# EAGLE board pcb board (EAGLE 9.2.2)
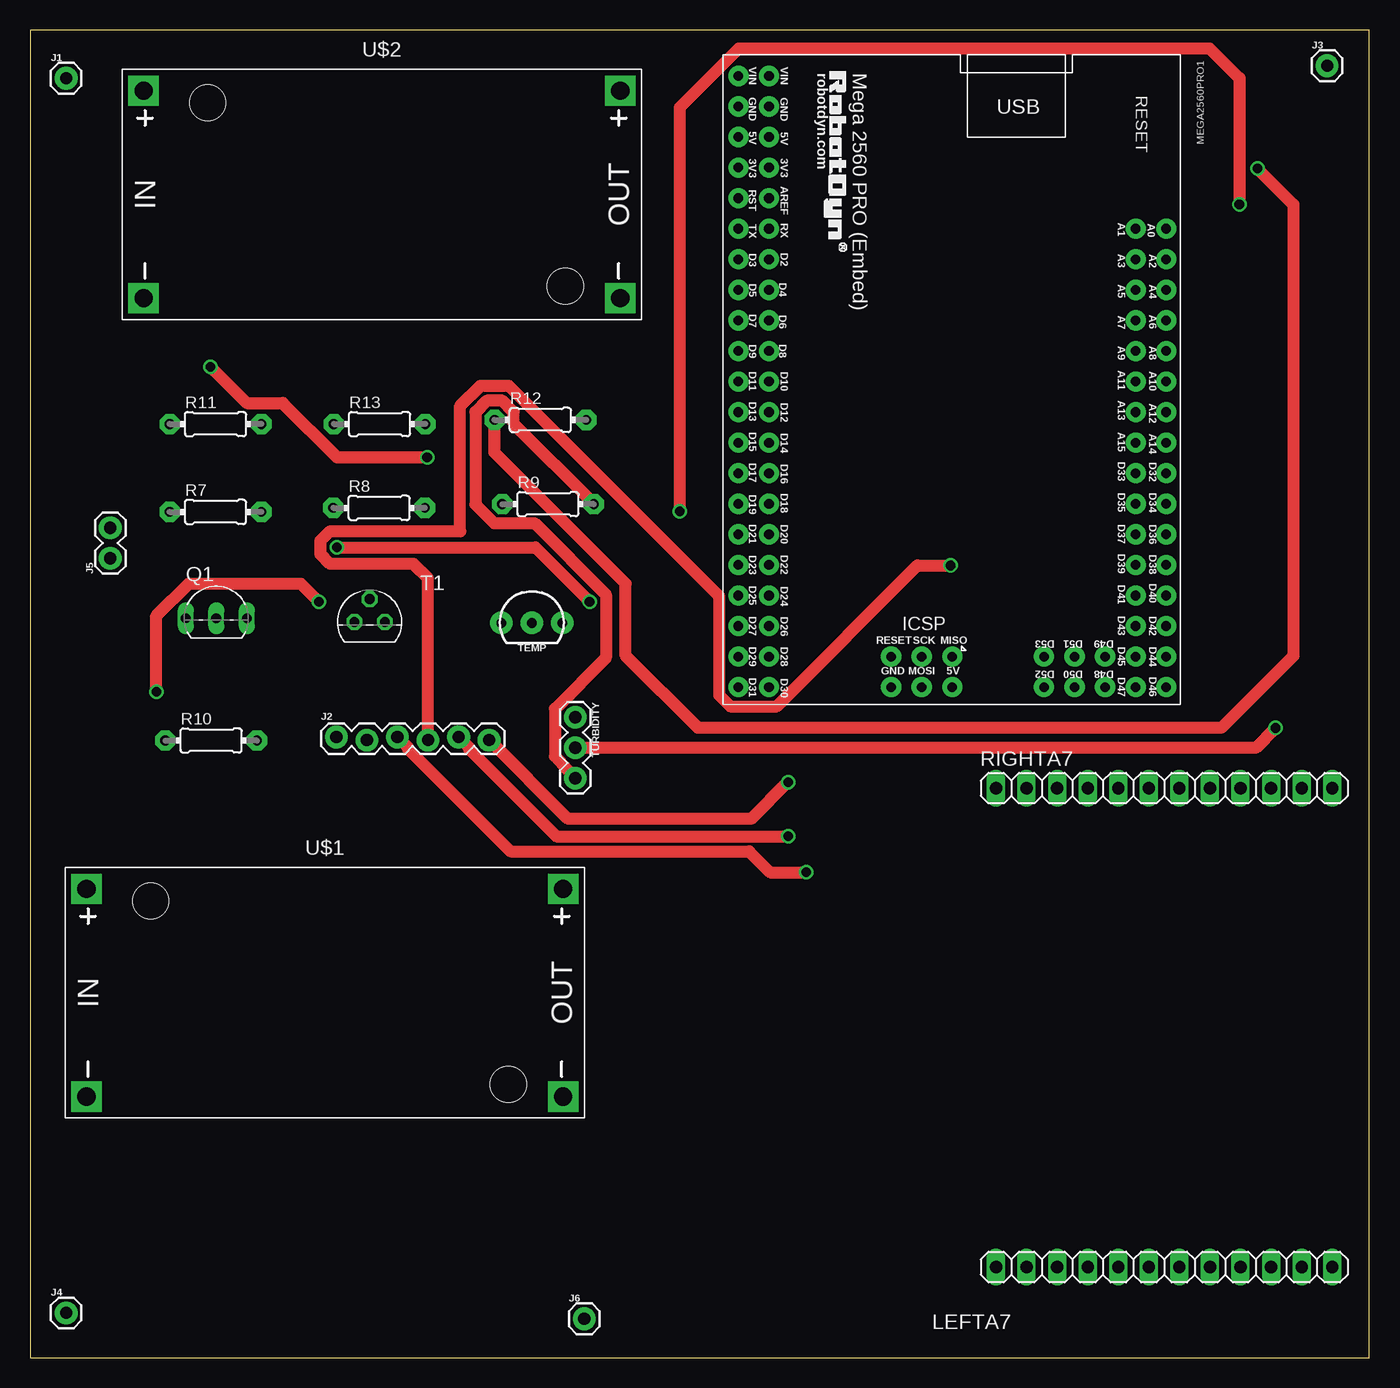
[diagram p0: board, top side]
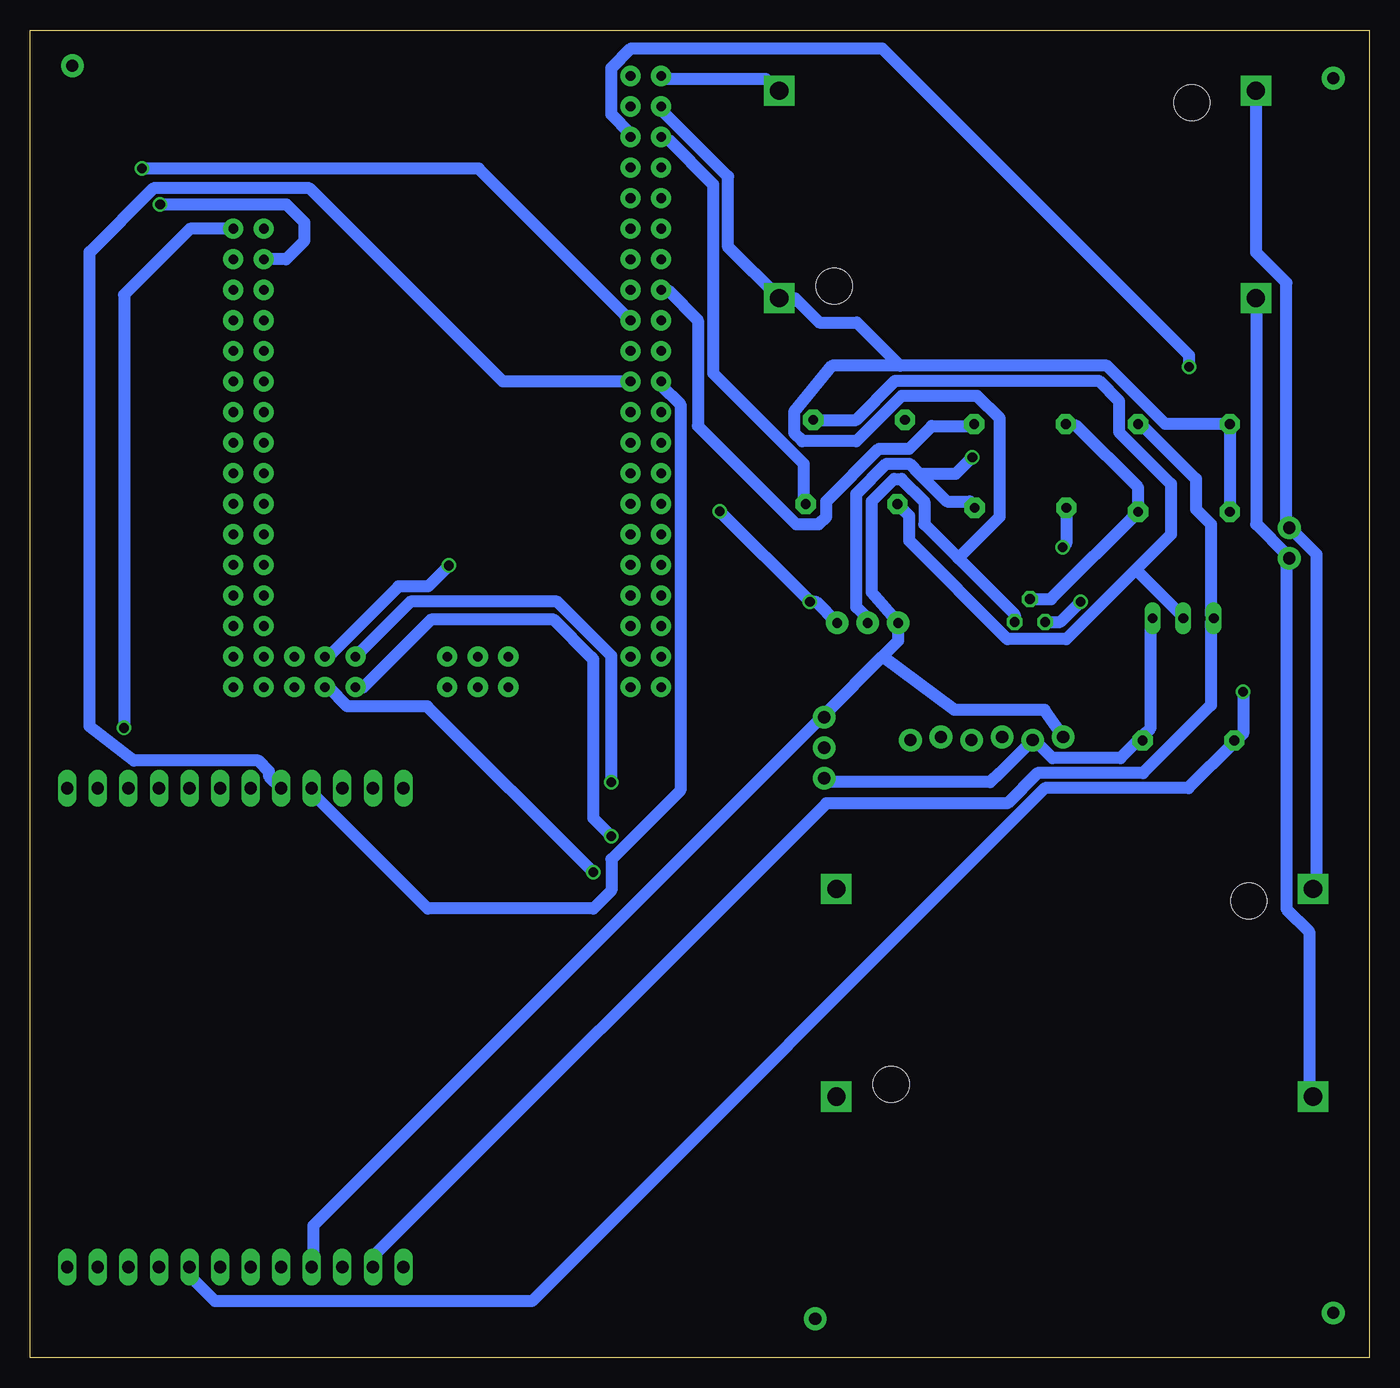
[diagram p1: board, bottom side, seen from below]

Size 111.31 x 110.32 mm. Coordinates in mm from the lower left corner, seen from the top.
Outline: 0,0 111.31,0 111.31,110.32 0,110.32 0,0
Copper layers (1*16): Top 0.035mm / dielectric 1.5mm / Bottom 0.035mm
Design rules "default": minimum track width 6mil, minimum drill 0.35mm, track to track 6mil, track to pad 6mil, pad to pad 6mil, via to via 6mil, smd to smd 6mil, copper to edge 40mil, drill to drill 6mil, minimum pad ring 10mil, minimum via ring 8mil, stop-mask expansion 4mil, vias tented up to drill 0mil, thermal gap 10mil
Net classes: 0 default: width 1 mm, drill 0.8 mm, clearance 0.254 mm

## Footprints (pad centres in the part's own frame; a part is rotated, then mirrored left to right if it is on the bottom)
1X01 = drill 1.016 pad 1.88: 1 0,0
1X06_LOCK = drill 1.016 pad 1.88: 1 0,0; 2 2.54,-0.254; 3 5.08,0; 4 7.62,-0.254; 5 10.16,0; 6 12.7,-0.254
1X02 = drill 1.016 pad 1.88: 1 0,0; 2 2.54,0
1X12 = drill 1.016 long: 1 -13.97,0; 2 -11.43,0; 3 -8.89,0; 4 -6.35,0; 5 -3.81,0; 6 -1.27,0; 7 1.27,0; 8 3.81,0; 9 6.35,0; 10 8.89,0; 11 11.43,0; 12 13.97,0
MEGA2560PRO-EMBED = drill 0.8 pad 1.676: 3V3@1 -25.4,-19.05; 3V3@2 -25.4,-16.51; 5V@1 -27.94,-19.05; 5V@2 -27.94,-16.51; 5V@3 17.78,-1.27; A0 -20.32,16.51; A1 -20.32,13.97; A2 -17.78,16.51; A3 -17.78,13.97; A4 -15.24,16.51; A5 -15.24,13.97; A6 -12.7,16.51; A7 -12.7,13.97; A8 -10.16,16.51; A9 -10.16,13.97; A10 -7.62,16.51; A11 -7.62,13.97; A12 -5.08,16.51; A13 -5.08,13.97; A14 -2.54,16.51; A15 -2.54,13.97; AREF -22.86,-16.51; D2 -17.78,-16.51; D3 -17.78,-19.05; D4 -15.24,-16.51; D5 -15.24,-19.05; D6 -12.7,-16.51; D7 -12.7,-19.05; D8 -10.16,-16.51; D9 -10.16,-19.05; D10 -7.62,-16.51; D11 -7.62,-19.05; D12 -5.08,-16.51; D13 -5.08,-19.05; D14 -2.54,-16.51; D15 -2.54,-19.05; D16 0,-16.51; D17 0,-19.05; D18 2.54,-16.51; D19 2.54,-19.05; D20 5.08,-16.51; D21 5.08,-19.05; D22 7.62,-16.51; D23 7.62,-19.05; D24 10.16,-16.51; D25 10.16,-19.05; D26 12.7,-16.51; D27 12.7,-19.05; D28 15.24,-16.51; D29 15.24,-19.05; D30 17.78,-16.51; D31 17.78,-19.05; D32 0,16.51; D33 0,13.97; D34 2.54,16.51; D35 2.54,13.97; D36 5.08,16.51; D37 5.08,13.97; D38 7.62,16.51; D39 7.62,13.97; D40 10.16,16.51; D41 10.16,13.97; D42 12.7,16.51; D43 12.7,13.97; D44 15.24,16.51; D45 15.24,13.97; D46 17.78,16.51; D47 17.78,13.97; D48 17.78,11.43; D49 15.24,11.43; D50 17.78,8.89; D51 15.24,8.89; D52 17.78,6.35; D53 15.24,6.35; GND@1 -30.48,-19.05; GND@2 -30.48,-16.51; GND@3 17.78,-6.35; MISO 15.24,-1.27; MOSI 17.78,-3.81; RESET 15.24,-6.35; RST -22.86,-19.05; RX -20.32,-16.51; SCK 15.24,-3.81; TX -20.32,-19.05; VIN@1 -33.02,-19.05; VIN@2 -33.02,-16.51
TO92-EBC = drill 0.813 long: B 0,-1.27; C -2.54,-1.27; E 2.54,-1.27
0204/7 = drill 0.813 pad 1.676 octagon: 1 -3.81,0; 2 3.81,0
TO92 = drill 0.813 octagon: 1 1.27,0; 2 0,1.905; 3 -1.27,0
TO-92-AMMO = drill 0.813 pad 1.88: 1 -2.54,0; 2 0,0; 3 2.54,0
1X03 = drill 1.016 pad 1.88: 1 0,0; 2 2.54,0; 3 5.08,0
DC-DC-STEP-DOWN-LM2596 = drill 1.5 pad 2.5 square: IN+ -19.812,8.636; IN- -19.812,-8.636; OUT+ 19.812,8.636; OUT- 19.812,-8.636 | hole 3: -14.478,7.62; 15.24,-7.62

## Placement (x,y rotation side)
J1  [1X01]  3,106.32 0 top
J2  [1X06_LOCK]  25.45,51.57 0 top
J3  [1X01]  107.8,107.36 0 top
J4  [1X01]  3,3.71 0 top
J5  [1X02]  6.66,66.42 90 top
J6  [1X01]  46.05,3.22 0 top
LEFTA7  [1X12]  94.25,7.52 0 top
MEGA2560PRO1  MEGA2560PRO-EMBED  [MEGA2560PRO-EMBED]  77.92,73.5 270 top
Q1  BC557  [TO92-EBC]  15.48,62.71 0 top
R7  1k  [0204/7]  15.41,70.28 0 top
R8  4.7K  [0204/7]  29,70.61 0 top
R9  1k  [0204/7]  43.04,70.93 0 top
R10  1k  [0204/7]  15.04,51.28 0 top
R11  1k  [0204/7]  15.41,77.58 0 top
R12  1k  [0204/7]  42.41,77.93 0 top
R13  1k  [0204/7]  29.04,77.58 0 top
RIGHTA7  [1X12]  94.25,47.32 0 top
T1  BC547  [TO92]  28.22,61.13 0 top
TEMP  DS18B20  [TO-92-AMMO]  41.7,61.05 0 top
TURBIDITY  455-1750-1-ND  [1X03]  45.31,53.22 270 top
U$1  DC-DC-STEP-DOWN-LM2596  [DC-DC-STEP-DOWN-LM2596]  24.5,30.32 0 top
U$2  DC-DC-STEP-DOWN-LM2596  [DC-DC-STEP-DOWN-LM2596]  29.24,96.66 0 top

## Library data of the parts
J1-J6 = SparkFun-Connectors
LEFTA7 R7-R13 RIGHTA7 = adafruit
MEGA2560PRO1 = robotdyn
Q1 = transistor-pnp
T1 = transistor
TEMP = SparkFun-Sensors; STORE_ID: SEN-00245
TURBIDITY = SparkFun-Connectors; PROD_ID: XXX-00000
U$1 U$2 = diy-modules

## Nets
50: J2.3 MEGA2560PRO1.D50
51: J2.4 MEGA2560PRO1.D51
52: J2.5 MEGA2560PRO1.D52
53: J2.6 MEGA2560PRO1.D53
A0: MEGA2560PRO1.A0 TURBIDITY.2
A3: MEGA2560PRO1.A3 R8.1 TEMP.3
CONN: J2.2 MEGA2560PRO1.5V@1 Q1.E R9.2 R10.2 TURBIDITY.3
CONN1: MEGA2560PRO1.5V@2 R8.2 TEMP.2
GND: J2.1 LEFTA7.4 MEGA2560PRO1.GND@1 R7.1 R11.1 T1.1 TEMP.1 TURBIDITY.1 U$2.OUT-
MEGA5: MEGA2560PRO1.D5 R13.2
MEGA6: MEGA2560PRO1.D6 R12.1
N$1: Q1.B R9.1 R12.2
N$27: R7.2 R13.1 T1.2
P1: J5.2 U$1.IN+ U$2.IN+
P2: J5.1 U$1.IN- U$2.IN-
PWR: LEFTA7.2 Q1.C R11.2
RST: LEFTA7.8 R10.1 T1.3
URXD: MEGA2560PRO1.D11 RIGHTA7.4
UTXD: MEGA2560PRO1.D10 RIGHTA7.5
VIN: MEGA2560PRO1.VIN@1 U$2.OUT+

## Tracks (layer width: path | path; a pad name or v marks a point on that pad's centre or on a via)
50  (via drill 0.8)
  Top 1: J2.3 31.38,50.73 31.38,50.62 39.92,42.07 59.75,42.07 61.5,40.32 v64.5,40.32
  Bottom 1: v64.5,40.32 78.3,54.12 84.92,54.12 86.52,55.71 MEGA2560PRO1.D50
51  (via drill 0.8)
  Top 1: v76.5,65.82 73.77,65.82 62.06,54.12 58.2,54.12 57.27,55.05 57.27,63.28 39.78,80.78 37.42,80.78 35.75,79.11 35.75,68.68 24.94,68.68 24.14,67.89 24.14,66.76 24.94,65.97 31.85,65.97 33.07,64.75 J2.4
  Bottom 1: v76.5,65.82 78.25,64.08 80.69,64.08 86.52,58.25 MEGA2560PRO1.D51
52  (via drill 0.8)
  Top 1: J2.5 36.46,50.73 36.46,50.62 43.75,43.32 v63,43.32
  Bottom 1: v63,43.32 64.5,44.82 64.5,58.05 64.64,58.19 67.77,61.32 78,61.32 83.61,55.71 MEGA2560PRO1.D52
53  (via drill 0.8)
  Top 1: J2.6 44.64,44.82 60,44.82 v63,47.82
  Bottom 1: v63,47.82 63,58.32 67.5,62.82 79.7,62.82 MEGA2560PRO1.D53
A0  (via drill 0.8)
  Top 1: TURBIDITY.2 101.85,50.68 v103.5,52.32
  Bottom 1: MEGA2560PRO1.A0 98.01,93.81 103.5,88.32 v103.5,52.32
A3  (via drill 0.8)
  Top 1: v25.5,67.32 42,67.32 v46.5,62.82 | v54,70.32 54,103.9 58.91,108.81 98.02,108.81 100.5,106.32 v100.5,95.82
  Bottom 1: R8.1 25.19,67.63 v25.5,67.32 | TEMP.3 46.01,62.82 v46.5,62.82 v54,70.32 | MEGA2560PRO1.A3 90.05,91.27 88.5,92.82 88.5,94.32 90,95.82 v100.5,95.82
CONN
  Top 1: R9.2 40.19,77.59 40.19,78.59 39.26,79.52 37.94,79.52 37.01,78.59 37.01,70.9 38.57,69.34 41.91,69.34 47.86,63.39 47.86,58.16 43.61,53.92 43.61,49.98 TURBIDITY.3
  Bottom 1: Q1.E 18.18,61.11 18.18,52.33 18.81,51.71 R10.2 19.44,51.08 20.69,49.82 26.33,49.82 27.59,51.08 J2.2 28.21,51.08 30.72,48.57 31.5,47.82 45,47.82 TURBIDITY.3 | R9.2 47.02,71.14 47.02,74.28 54.55,81.8 54.55,97.48 58.31,101.24 MEGA2560PRO1.5V@1
CONN1  (via drill 0.8)
  Top 1: v15,82.32 18,79.32 21,79.32 25.5,74.82 v33,74.82
  Bottom 1: 37.4,73.43 38.25,74.28 40.13,74.28 42.64,71.77 42.64,62.36 41.38,61.11 TEMP.2 | 37.4,73.43 35.11,71.14 33.23,71.14 R8.2 | MEGA2560PRO1.5V@2 61.41,101.72 63,103.31 63,107.17 61.36,108.81 40.5,108.81 15,83.31 v15,82.32 | v33,74.82 34.4,73.43 37.4,73.43
GND
  Bottom 1: 34.17,66.44 36.99,69.26 36.99,71.14 38.87,73.02 39.5,73.02 41.38,71.14 41.38,63.62 TEMP.1 39.16,59.57 40.45,58.28 | 34.17,66.44 29.47,61.74 T1.1 | LEFTA7.4 87.78,7.82 87.78,10.95 45.77,52.96 TURBIDITY.1 45.14,53.59 40.45,58.28 | 34.17,66.44 30.72,69.89 30.72,78.04 32.6,79.92 38.87,79.92 42.64,76.16 47.13,76.16 47.81,76.84 47.81,78.59 44.66,82.43 39,82.43 | J2.1 27,53.82 34.5,53.82 40.45,58.28 | R7.1 R11.1 16.97,77.58 21.82,82.43 39,82.43 | MEGA2560PRO1.GND@1 58.87,103.71 53.3,98.14 53.3,92.27 U$2.OUT- 47.73,88.03 45.73,86.03 42.6,86.03 39,82.43
MEGA5
  Bottom 1: R13.2 33.23,77.41 36.37,77.41 38.25,75.53 40.76,75.53 45.14,71.14 45.14,69.89 45.77,69.26 47.65,69.26 55.8,77.41 55.8,86.19 58.31,88.7 MEGA2560PRO1.D5
MEGA6  (via drill 0.8)
  Top 1: v102,98.82 105,95.82 105,58.32 99,52.32 55.5,52.32 49.5,58.32 49.5,64.32 38.6,75.22 R12.1
  Bottom 1: MEGA2560PRO1.D6 74.03,98.82 v102,98.82
N$1
  Bottom 1: R12.2 42.64,77.93 39.39,81.17 22.5,81.17 20.81,79.49 20.81,76.92 16.5,72.61 16.5,68.41 19.29,65.61 | R9.1 38.25,69.94 38.25,67.89 30.07,59.72 25.19,59.72 19.29,65.61 | Q1.B 15.48,61.56 19.29,65.37 19.29,65.61
N$27
  Bottom 1: R13.1 24.38,77.45 19.22,72.29 R7.2 26.47,63.03 T1.2
P1
  Bottom 1: U$1.IN+ 4.39,39.17 4.39,66.75 6.27,68.64 J5.2 6.9,69.26 6.9,89.33 9.4,91.83 9.4,105 U$2.IN+
P2
  Bottom 1: U$2.IN- 9.4,87.44 9.4,69.26 6.9,66.75 J5.1 6.9,66.13 6.9,37.28 5.02,35.4 5.02,22.24 U$1.IN-
PWR
  Bottom 1: R11.2 18.81,77.41 14.42,73.02 14.42,70.52 13.17,69.26 13.17,61.74 Q1.C 13.17,61.11 13.17,54.21 18.81,48.57 27.59,48.57 30.1,46.06 45.14,46.06 82.76,8.44 82.76,7.82 LEFTA7.2
RST  (via drill 0.8)
  Top 1: v24,62.82 22.5,64.32 13.16,64.32 10.5,61.66 v10.5,55.32
  Bottom 1: 11.29,51.08 15.05,47.32 26.96,47.32 69.6,4.68 95.93,4.68 97.81,6.56 97.81,7.19 LEFTA7.8 | 11.29,51.08 R10.1 | T1.3 25.69,61.13 v24,62.82 | v10.5,55.32 10.5,51.86 11.29,51.08
URXD
  Bottom 1: MEGA2560PRO1.D11 58.87,80.83 57.27,79.23 57.27,47.13 63,41.41 63,38.82 64.5,37.32 78.27,37.32 87.9,46.96 RIGHTA7.4
UTXD
  Bottom 1: MEGA2560PRO1.D10 72.02,81.11 88.08,97.18 101.06,97.18 106.36,91.89 106.36,52.47 102.7,49.6 92.35,49.6 91.46,48.71 91.46,48.35 RIGHTA7.5
VIN
  Bottom 1: MEGA2560PRO1.VIN@1 58.31,106.25 50.16,106.25 49.53,105.63 U$2.OUT+